# EAGLE board Schematic_EBook_v38 (EAGLE 9.7.0)
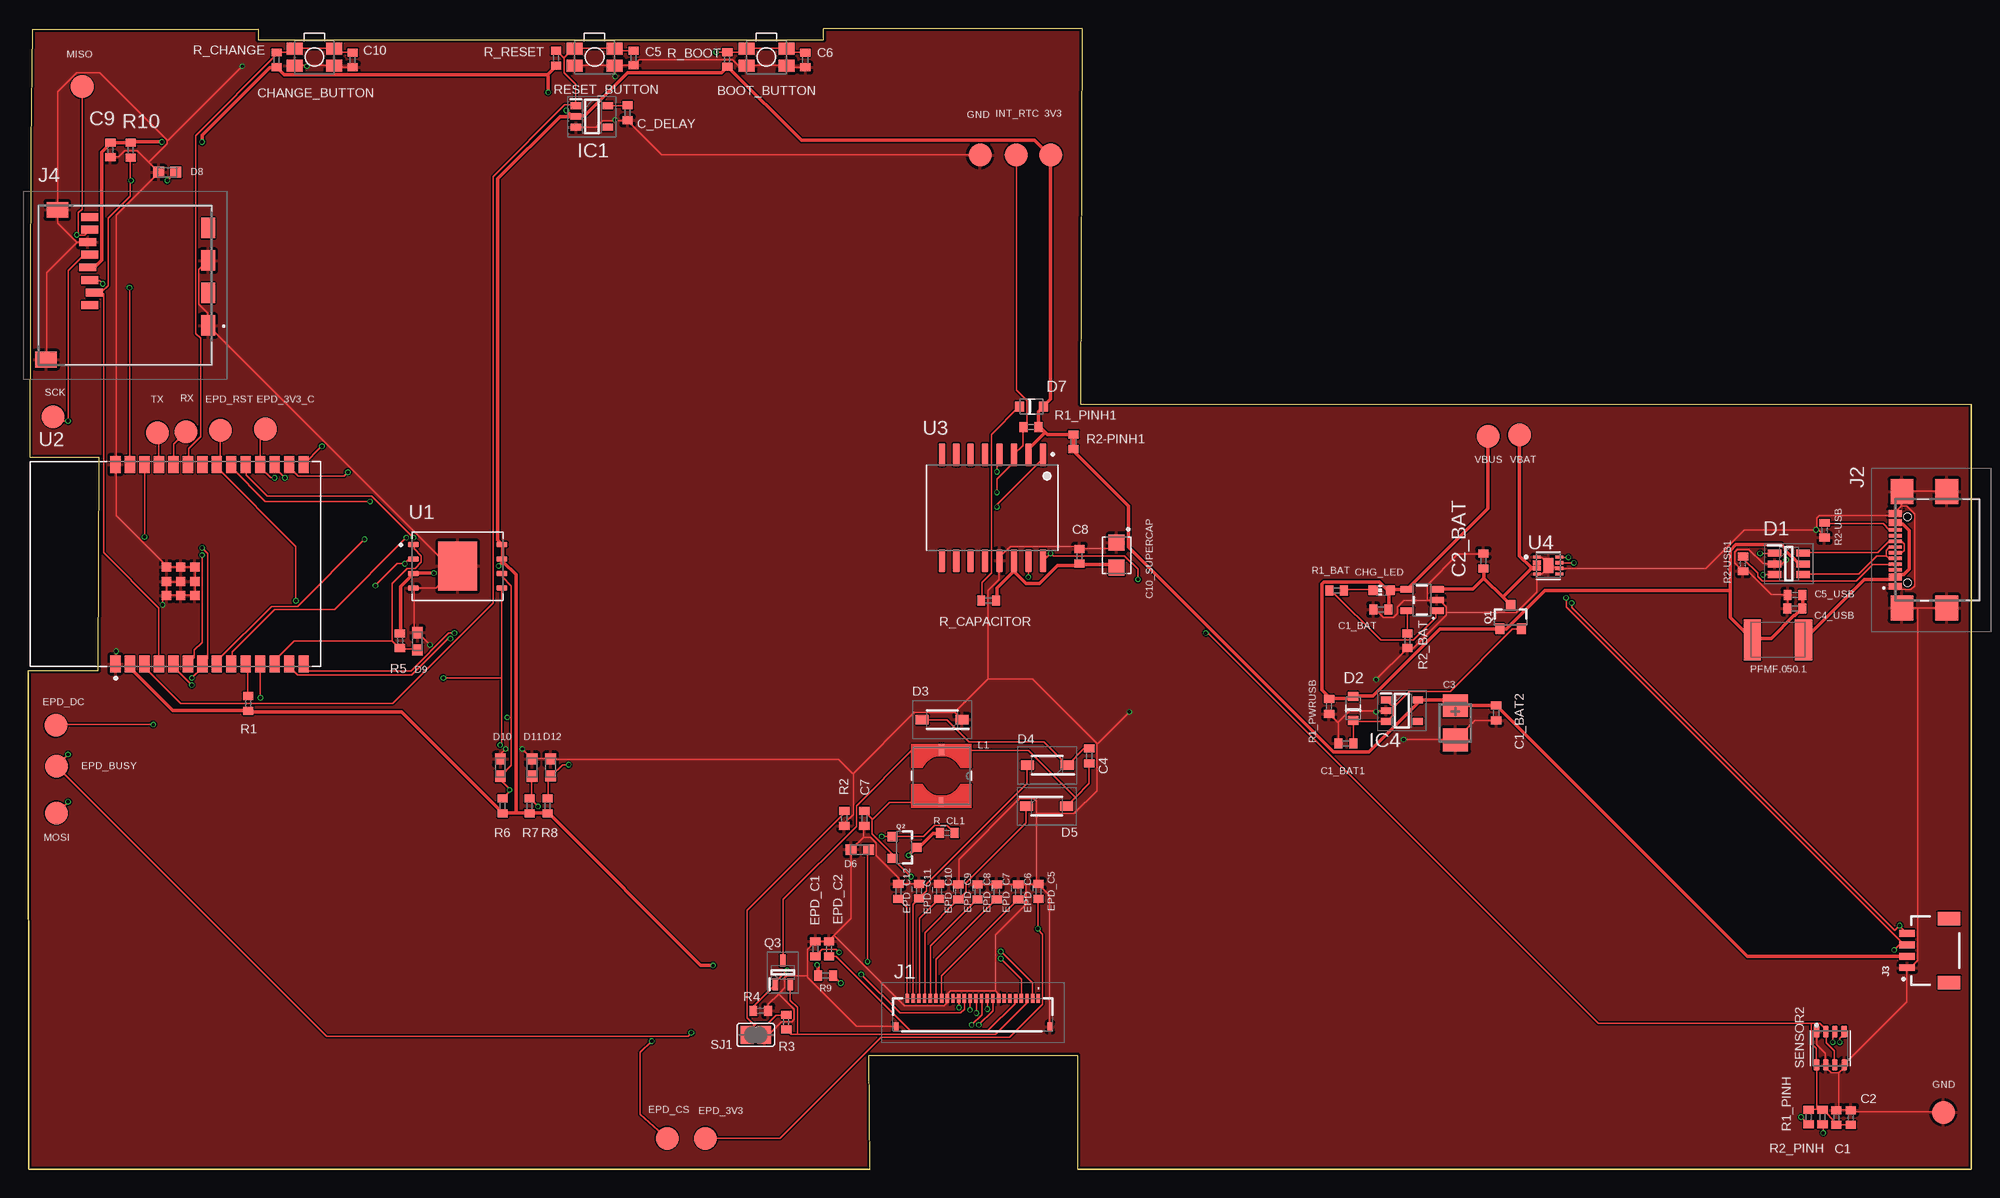
[diagram p0: board, top side]
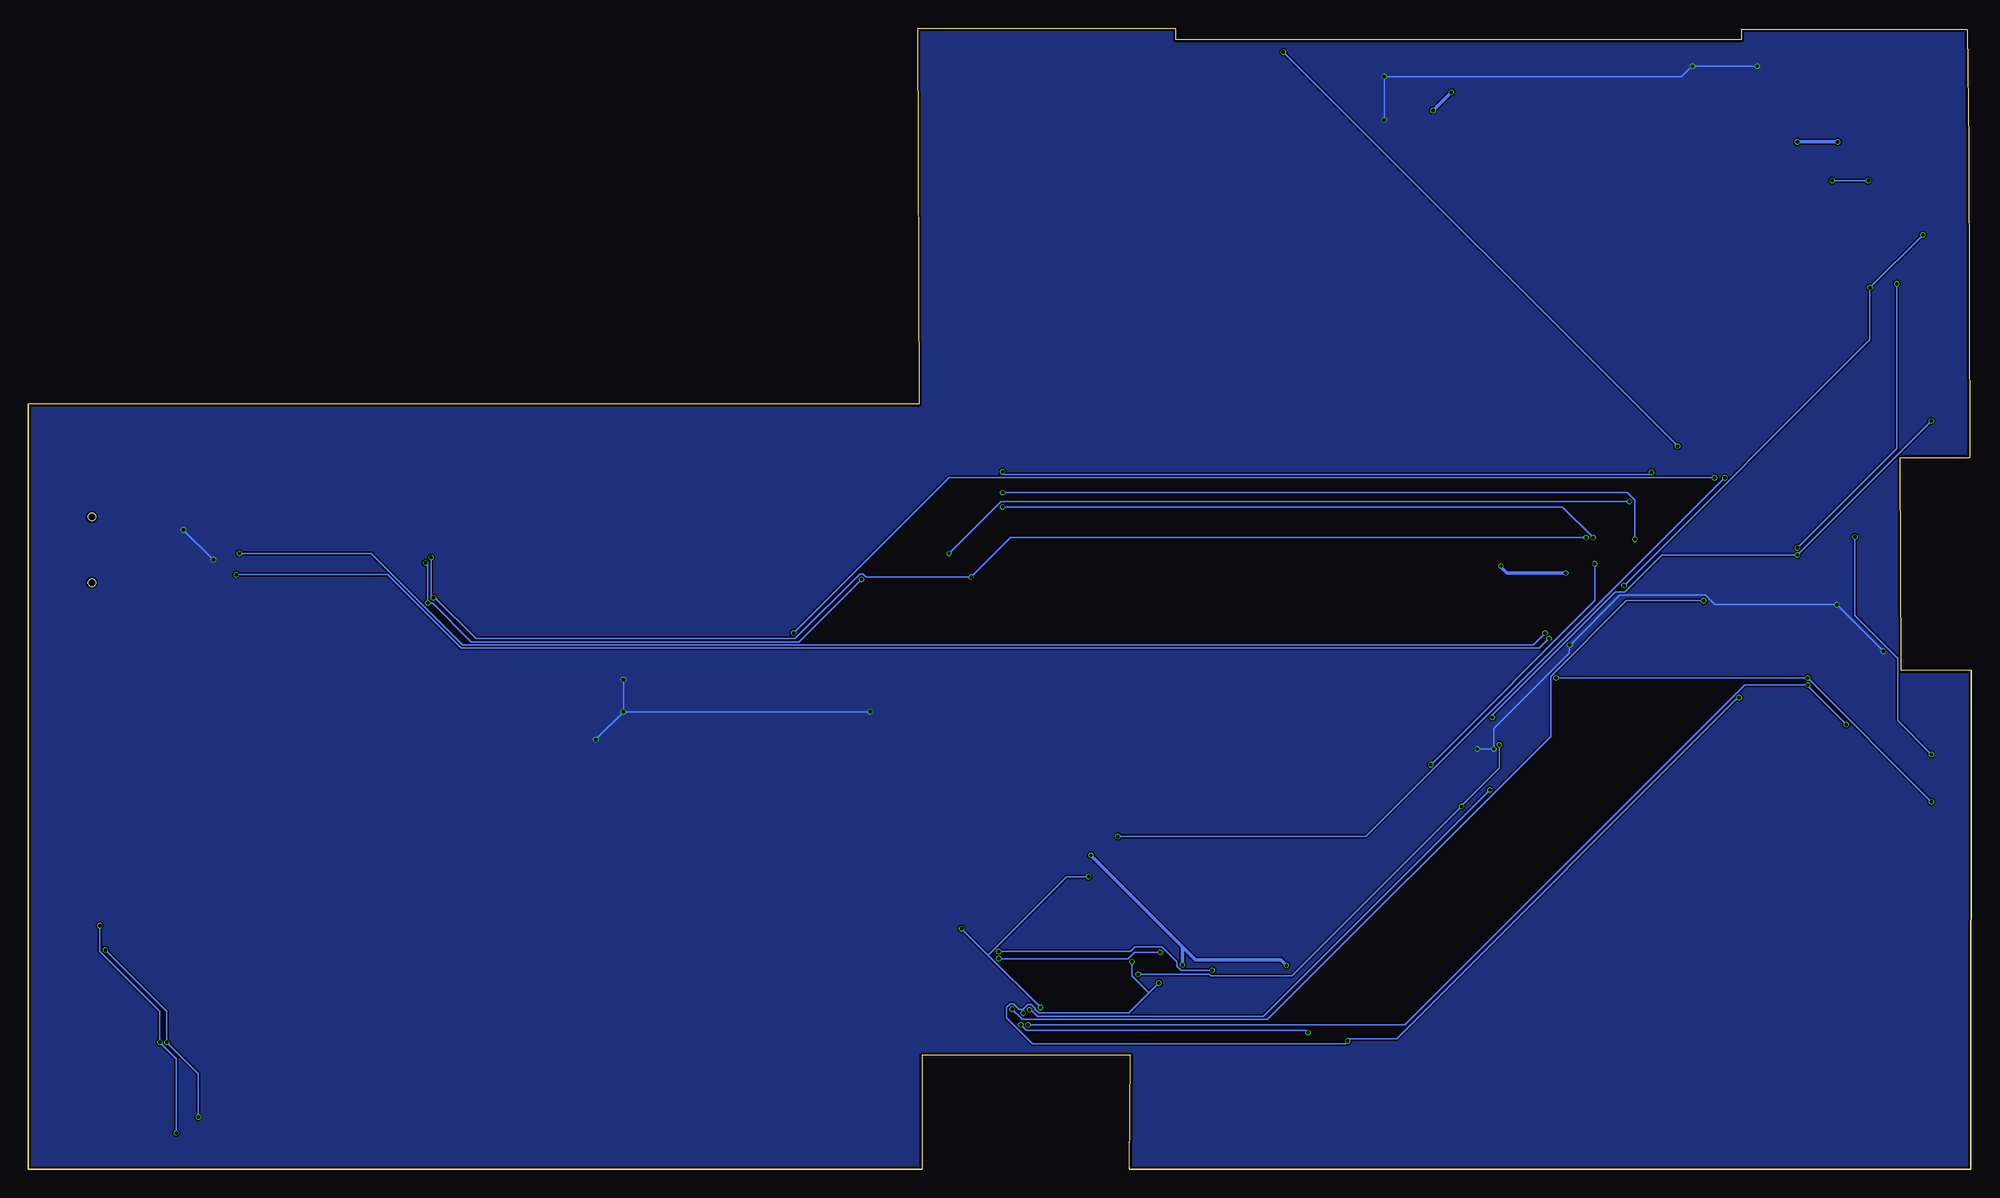
[diagram p1: board, bottom side, seen from below]

Size 170.61 x 100.2 mm. Coordinates in mm from the lower left corner, seen from the top.
Outline: 0.01,0 73.91,0
Outline: 92.11,0 170.61,0
Outline: 170.61,0 170.61,67.2
Outline: 92.51,100.2 69.81,100.17
Outline: 20.19,100.12 0.31,100.1
Outline: 0,43.8 0.01,0
Outline: 0.31,100.1 20.19,100.12
Outline: 69.81,100.17 92.51,100.2
Outline: 92.51,100.2 92.41,67.2 170.61,67.2
Outline: 170.61,67.2 170.61,0
Outline: 170.61,0 92.11,0
Outline: 73.91,0 0.01,0
Outline: 0.01,0 0,43.8
Outline: 73.91,0 73.81,10 92.01,10 92.11,10 92.11,0
Outline: 0,43.8 6.11,43.8 6.21,62.5 0.1,62.5 0.2,89.9 0.31,100.1
Outline: 20.19,100.12 20.19,99.2 69.81,99.2 69.81,100.17
Copper layers (1*16): Top 0.035mm / dielectric 1.6mm / Bottom 0.035mm
Design rules "jlcpcb-2layers.dru *": minimum track width 0.15mm, minimum drill 0.3mm, track to track 5mil, track to pad 5mil, pad to pad 5mil, via to via 5mil, smd to smd 5mil, copper to edge 0.2mm, drill to drill 6mil, minimum pad ring 10mil, minimum via ring 3mil, stop-mask expansion 4mil, vias tented up to drill 0mil, thermal gap 10mil
Net classes: 2 Power: width 0.3 mm

## Footprints (pad centres in the part's own frame; a part is rotated, then mirrored left to right if it is on the bottom)
MYBUTTON = smd 1.4 x 1.05: 1 1.75,0.75; 2 -1.75,0.75; 3 -1.75,-0.75; 4 1.75,-0.75
EAGLE-LTSPICE_C0402 = smd 0.7 x 0.9: 1 -0.65,0; 2 0.65,0
RCL_CT3528 = smd 2 x 2.2: + -1.5,0; - 1.5,0
CAPCP3225X100N = smd 1.4 x 1.4: 1 -1.1,0; 2 1.1,0
ADAFRUIT_CHIP-LED0603 = smd 0.8 x 0.8: A 0,-0.75; C 0,0.75
SOT95P280X145-6N = smd 1.2 x 0.6: 1 -1.25,0.95; 2 -1.25,0; 3 -1.25,-0.95; 4 1.25,-0.95; 5 1.25,0; 6 1.25,0.95
ESP32_WROVER_AVX---SD0805S020S1R0_AVX_SD0805S020S1R0_0 = smd 0.8 x 0.9: 1 -1.05,0; 2 1.05,0
SOD3716X135N = smd 1.15 x 0.8: 1 -1.75,0; 2 1.75,0
DIOC1608X36N = smd 0.97 x 0.94: 1 -0.75,0; 2 0.75,0
SOT95P280X125-5N = smd 0.9 x 0.6: 1 -1.4,0.95; 2 -1.4,0; 3 -1.4,-0.95; 4 1.4,-0.95; 5 1.4,0.95
SOT95P280X120-5N = smd 0.9 x 0.6: 1 -1.4,0.95; 2 -1.4,0; 3 -1.4,-0.95; 4 1.4,-0.95; 5 1.4,0.95
FH34SRJ24S05SH99 = smd 0.3 x 0.8: 1 5.75,1.45; 2 5.25,1.45; 3 4.75,1.45; 4 4.25,1.45; 5 3.75,1.45; 6 3.25,1.45; 7 2.75,1.45; 8 2.25,1.45; 9 1.75,1.45; 10 1.25,1.45; 11 0.75,1.45; 12 0.25,1.45; 13 -0.25,1.45; 14 -0.75,1.45; 15 -1.25,1.45; 16 -1.75,1.45; 17 -2.25,1.45; 18 -2.75,1.45; 19 -3.25,1.45; 20 -3.75,1.45; 21 -4.25,1.45; 22 -4.75,1.45; 23 -5.25,1.45; 24 -5.75,1.45 | smd 0.4 x 0.8: MP1 6.75,-1.05; MP2 -6.75,-1.05
SAMACSYS_PARTS_USB4110GFA = smd 0.3 x 1.15: A1 -3.35,3.678; A4 -2.55,3.678; A5 -1.25,3.678; A6 -0.25,3.678; A7 0.25,3.678; A8 1.25,3.678; A9 2.55,3.678; A12 3.35,3.678; B1 3.05,3.678; B4 2.25,3.678; B5 1.75,3.678; B6 0.75,3.678; B7 -0.75,3.678; B8 -1.75,3.678; B9 -2.25,3.678; B12 -3.05,3.678 | smd 2.18 x 2: MP1 -5.11,-0.827; MP2 5.11,-0.827; MP3 -5.11,3.103; MP4 5.11,3.103 | hole 0.65: -2.89,2.603; 2.89,2.603
JST04_1MM_RA = smd 0.6 x 1.35: 1 -1.5,0; 2 -0.5,0; 3 0.5,0; 4 1.5,0 | smd 1.2 x 2: NC1 2.8,-3.675; NC2 -2.8,-3.675
112ATAARR03ATTEND = smd 1.8 x 1.2: G1 10.6,10.4; G2 4.9,10.4; S1 7.75,10.4; S2 2.05,10.4 | smd 1.4 x 1.9: G3 13.6,-3.85; G4 0.45,-2.85 | smd 0.7 x 1.5: P1 8.8,0; P2 7.7,0.4; P3 6.6,0; P4 5.5,-0.2; P5 4.4,0; P6 3.3,-0.2; P7 2.2,0; P8 1.1,0
IND_4828-WE-TPC_WRE = smd 1.016 x 0.508: 1 -2.286,0 | smd 0.813 x 0.406: 2 2.286,0
ESP32_WROVER_SPARKFUN-IC-POWER_SOT23-5 = smd 0.55 x 1.2: 1 -0.95,-1.3; 2 0,-1.3; 3 0.95,-1.3; 4 0.95,1.3; 5 -0.95,1.3
ESP32C6_VARISTOR_CT/CN1812 = smd 1.5 x 3.6: 1 -2.25,0; 2 2.25,0
ESP32_WROVER_SPARKFUN-DISCRETESEMI_SOT23-3 = smd 0.8 x 0.9: 1 -0.95,-1; 2 0.95,-1; 3 0,1.1
SOT65P210X110-3N = smd 1.05 x 0.5: 1 -1.05,0.65; 2 -1.05,-0.65; 3 1.05,0
ESP32_WROVER_EAGLE-LTSPICE_R0402 = smd 0.7 x 0.9: 1 -0.65,0; 2 0.65,0
ESP32_WROVER_BME680_PSON80P300X300X100-8N = smd 1.016 x 0.5: 1 1.458,1.2; 2 1.458,0.4; 3 1.458,-0.4; 4 1.458,-1.2; 5 -1.458,-1.22; 6 -1.458,-0.4; 7 -1.458,0.4; 8 -1.458,1.2
SJ = smd 1.168 x 1.6: 1 -0.762,0; 2 0.762,0
TP20R = smd 2 x 2: TP 0,0
SON127P600X800X80-9N = smd 0.94 x 0.44: 1 -3.895,1.905; 2 -3.895,0.635; 3 -3.895,-0.635; 4 -3.895,-1.905; 5 3.895,-1.905; 6 3.895,-0.635; 7 3.895,0.635; 8 3.895,1.905 | smd 3.4 x 4.3: 9 0,0
XCVR_ESP32-C6-WROOM-1-N8 = smd 1.5 x 0.9: 1 -8.75,5.26; 2 -8.75,3.99; 3 -8.75,2.72; 4 -8.75,1.45; 5 -8.75,0.18; 6 -8.75,-1.09; 7 -8.75,-2.36; 8 -8.75,-3.63; 9 -8.75,-4.9; 10 -8.75,-6.17; 11 -8.75,-7.44; 12 -8.75,-8.71; 13 -8.75,-9.98; 14 -8.75,-11.25; 15 8.75,-11.25; 16 8.75,-9.98; 17 8.75,-8.71; 18 8.75,-7.44; 19 8.75,-6.17; 20 8.75,-4.9; 21 8.75,-3.63; 22 8.75,-2.36; 23 8.75,-1.09; 24 8.75,0.18; 25 8.75,1.45; 26 8.75,2.72; 27 8.75,3.99; 28 8.75,5.26 | smd 0.8 x 0.8: 29_1 -2.755,0.79; 29_2 -1.505,0.79; 29_3 -0.255,0.79; 29_4 -2.755,-0.46; 29_5 -1.505,-0.46; 29_6 -0.255,-0.46; 29_7 -2.755,-1.71; 29_8 -1.505,-1.71; 29_9 -0.255,-1.71
SOIC127P1032X265-16N = smd 2.05 x 0.59: 1 -4.655,4.445; 2 -4.655,3.175; 3 -4.655,1.905; 4 -4.655,0.635; 5 -4.655,-0.635; 6 -4.655,-1.905; 7 -4.655,-3.175; 8 -4.655,-4.445; 9 4.655,-4.445; 10 4.655,-3.175; 11 4.655,-1.905; 12 4.655,-0.635; 13 4.655,0.635; 14 4.655,1.905; 15 4.655,3.175; 16 4.655,4.445
SON50P200X200X80-9N = smd 0.76 x 0.27: 1 -0.985,0.75; 4 -0.985,-0.75; 5 0.985,-0.75; 6 0.985,-0.25; 7 0.985,0.25; 8 0.985,0.75 | smd 0.813 x 0.406: 2 -0.985,0.25; 3 -0.985,-0.25 | smd 0.9 x 1.3: 9 0,0

## Placement (x,y rotation side)
BOOT_BUTTON  BUTTON_CUSYOMV1  [MYBUTTON]  64.81,97.69 180 top
C1  100nF  [EAGLE-LTSPICE_C0402]  158.77,4.53 90 top
C1_BAT  4.7uF  [EAGLE-LTSPICE_C0402]  118.77,49.15 180 top
C1_BAT1  4.7uF  [EAGLE-LTSPICE_C0402]  115.71,37.4 180 top
C1_BAT2  4.7uF  [EAGLE-LTSPICE_C0402]  128.9,40.07 270 top
C2  100nF  [EAGLE-LTSPICE_C0402]  160.05,4.53 90 top
C2_BAT  4.7uF  [EAGLE-LTSPICE_C0402]  127.79,53.43 90 top
C3  100uF TANT  [RCL_CT3528]  125.32,39.2 270 top
C4  4.7uF/25V  [EAGLE-LTSPICE_C0402]  93.16,36.29 270 top
C4_USB  100nF  [EAGLE-LTSPICE_C0402]  155.12,49.25 180 top
C5  1uF  [EAGLE-LTSPICE_C0402]  53.14,97.61 270 top
C5_USB  4.7uF  [EAGLE-LTSPICE_C0402]  155.15,50.43 180 top
C6  100nF  [EAGLE-LTSPICE_C0402]  68.23,97.43 270 top
C7  10uF  [EAGLE-LTSPICE_C0402]  73.41,30.81 270 top
C8  100nF  [EAGLE-LTSPICE_C0402]  92.31,53.83 90 top
C9  100nF  [EAGLE-LTSPICE_C0402]  7.19,89.52 270 top
C10  100nF  [EAGLE-LTSPICE_C0402]  28.47,97.43 270 top
C10_SUPERCAP  CPH3225A  [CAPCP3225X100N]  95.57,53.94 270 top
C_DELAY  100nF  [EAGLE-LTSPICE_C0402]  52.62,92.79 270 top
CHANGE_BUTTON  BUTTON_CUSYOMV1  [MYBUTTON]  25.11,97.69 180 top
CHG_LED  &  [ADAFRUIT_CHIP-LED0603]  118.85,50.85 90 top
D1  USBLC6-2SC6Y  [SOT95P280X145-6N]  154.61,53.17 0 top
D2  ESP32_WROVER_AVX---SD0805S020S1R0_AVX_SD0805S020S1R0_0_0AVX_SD0805S020S1R0_0_0  [ESP32_WROVER_AVX---SD0805S020S1R0_AVX_SD0805S020S1R0_0]  116.35,40.48 90 top
D3  MBR0530  [SOD3716X135N]  80.24,39.48 180 top
D4  MBR0530  [SOD3716X135N]  89.48,35.48 180 top
D5  MBR0530  [SOD3716X135N]  89.42,31.88 0 top
D6  PGB1010603MR  [DIOC1608X36N]  73.01,28.07 0 top
D7  ESP32_WROVER_AVX---SD0805S020S1R0_AVX_SD0805S020S1R0_0_0AVX_SD0805S020S1R0_0_0  [ESP32_WROVER_AVX---SD0805S020S1R0_AVX_SD0805S020S1R0_0]  88.1,66.98 0 top
D8  PGB1010603MR  [DIOC1608X36N]  12.19,87.57 0 top
D9  PGB1010603MR  [DIOC1608X36N]  34.17,46.37 270 top
D10  PGB1010603MR  [DIOC1608X36N]  41.45,35.27 270 top
D11  PGB1010603MR  [DIOC1608X36N]  44.23,35.27 270 top
D12  PGB1010603MR  [DIOC1608X36N]  45.86,35.28 270 top
EPD_C1  1uF/50V  [EAGLE-LTSPICE_C0402]  69.11,19.35 90 top
EPD_C2  1uF/50V  [EAGLE-LTSPICE_C0402]  70.32,19.35 90 top
EPD_C5  0.1uF/50V  [EAGLE-LTSPICE_C0402]  88.7,24.39 90 top
EPD_C6  1uF/50V  [EAGLE-LTSPICE_C0402]  86.93,24.35 90 top
EPD_C7  1uF/50V  [EAGLE-LTSPICE_C0402]  85.04,24.35 90 top
EPD_C8  1uF/50V  [EAGLE-LTSPICE_C0402]  83.35,24.35 90 top
EPD_C9  1uF/50V  [EAGLE-LTSPICE_C0402]  81.66,24.35 90 top
EPD_C10  1uF/50V  [EAGLE-LTSPICE_C0402]  79.96,24.39 90 top
EPD_C11  1uF/50V  [EAGLE-LTSPICE_C0402]  78.22,24.42 90 top
EPD_C12  1uF/50V  [EAGLE-LTSPICE_C0402]  76.4,24.39 90 top
IC1  BD5229G-TR  [SOT95P280X125-5N]  49.48,92.47 0 top
IC4  XC6220A331MR-G  [SOT95P280X120-5N]  120.62,40.27 0 top
J1  FH34SRJ-24S-0.5SH_99_  [FH34SRJ24S05SH99]  82.95,13.54 0 top
J2  SAMACSYS_PARTS_USB4110-GF-A  [SAMACSYS_PARTS_USB4110GFA]  167.65,54.4 90 top
J3  QWIIC_RIGHT_ANGLE  [JST04_1MM_RA]  165,19.2 90 top
J4  112A-TAAR-R03_ATTEND  [112ATAARR03ATTEND]  5.39,84.71 270 top
L1  68uH  [IND_4828-WE-TPC_WRE]  80.18,34.55 270 top
MCP73831  ESP32_WROVER_SPARKFUN-IC-POWER_MCP73831  [ESP32_WROVER_SPARKFUN-IC-POWER_SOT23-5]  122.39,49.99 90 top
PFMF.050.1  ESP32C6_VARISTORCN1812  [ESP32C6_VARISTOR_CT/CN1812]  153.65,46.5 180 top
Q1  20V/4.2A/52mΩ/1.4W  [ESP32_WROVER_SPARKFUN-DISCRETESEMI_SOT23-3]  130.17,48.46 0 top
Q2  20V/4.2A/52mΩ/1.4W  [ESP32_WROVER_SPARKFUN-DISCRETESEMI_SOT23-3]  76.89,28.26 270 top
Q3  SI1308EDL-T1-GE3  [SOT65P210X110-3N]  66.25,17.28 90 top
R1  10K  [ESP32_WROVER_EAGLE-LTSPICE_R0402]  19.29,40.91 90 top
R1_BAT  200  [ESP32_WROVER_EAGLE-LTSPICE_R0402]  114.9,50.83 0 top
R1_PINH  10K  [ESP32_WROVER_EAGLE-LTSPICE_R0402]  156.34,4.57 90 top
R1_PINH1  10K  [ESP32_WROVER_EAGLE-LTSPICE_R0402]  88.05,65.19 0 top
R1_PWRUSB  100K  [ESP32_WROVER_EAGLE-LTSPICE_R0402]  114.23,40.64 90 top
R2  2.2  [ESP32_WROVER_EAGLE-LTSPICE_R0402]  71.65,30.81 90 top
R2-PINH1  10K  [ESP32_WROVER_EAGLE-LTSPICE_R0402]  91.78,63.89 90 top
R2-USB  5k1  [ESP32_WROVER_EAGLE-LTSPICE_R0402]  157.75,56.13 270 top
R2-USB1  5k1  [ESP32_WROVER_EAGLE-LTSPICE_R0402]  150.58,53.17 90 top
R2_BAT  2K  [ESP32_WROVER_EAGLE-LTSPICE_R0402]  121.11,46.42 90 top
R2_PINH  10K  [ESP32_WROVER_EAGLE-LTSPICE_R0402]  157.56,4.57 90 top
R3  0.47  [ESP32_WROVER_EAGLE-LTSPICE_R0402]  66.55,12.92 90 top
R4  10K  [ESP32_WROVER_EAGLE-LTSPICE_R0402]  64.31,13.91 0 top
R5  10K  [ESP32_WROVER_EAGLE-LTSPICE_R0402]  32.63,46.41 90 top
R6  10K  [ESP32_WROVER_EAGLE-LTSPICE_R0402]  41.65,31.91 270 top
R7  10K  [ESP32_WROVER_EAGLE-LTSPICE_R0402]  44.01,31.91 270 top
R8  10K  [ESP32_WROVER_EAGLE-LTSPICE_R0402]  45.59,31.91 270 top
R9  10K  [ESP32_WROVER_EAGLE-LTSPICE_R0402]  70.01,17.01 180 top
R10  10K  [ESP32_WROVER_EAGLE-LTSPICE_R0402]  8.97,89.51 90 top
R_BOOT  10K  [ESP32_WROVER_EAGLE-LTSPICE_R0402]  61.37,97.47 90 top
R_CAPACITOR  15  [ESP32_WROVER_EAGLE-LTSPICE_R0402]  84.33,49.94 180 top
R_CHANGE  10K  [ESP32_WROVER_EAGLE-LTSPICE_R0402]  21.8,97.44 90 top
R_CL1  10K  [ESP32_WROVER_EAGLE-LTSPICE_R0402]  80.69,29.53 0 top
R_RESET  10K  [ESP32_WROVER_EAGLE-LTSPICE_R0402]  46.34,97.59 90 top
RESET_BUTTON  BUTTON_CUSYOMV1  [MYBUTTON]  49.71,97.69 180 top
SENSOR2  ESP32_WROVER_BME680_BME680  [ESP32_WROVER_BME680_PSON80P300X300X100-8N]  158.25,10.62 90 top
SJ1  &  [SJ]  63.87,11.79 180 top
TP1  TPTP20R  [TP20R]  11.32,64.69 0 top
TP2  TPTP20R  [TP20R]  13.85,64.78 0 top
TP3  TPTP20R  [TP20R]  130.96,64.49 0 top
TP4  TPTP20R  [TP20R]  168.18,4.99 0 top
TP5  TPTP20R  [TP20R]  83.57,89.09 0 top
TP6  TPTP20R  [TP20R]  4.72,95.09 0 top
TP7  TPTP20R  [TP20R]  2.44,31.29 0 top
TP8  TPTP20R  [TP20R]  2.16,66.09 0 top
TP9  TPTP20R  [TP20R]  2.48,35.39 0 top
TP10  TPTP20R  [TP20R]  56.1,2.71 0 top
TP11  TPTP20R  [TP20R]  2.4,38.99 0 top
TP12  TPTP20R  [TP20R]  16.85,64.91 0 top
TP13  TPTP20R  [TP20R]  20.8,65.01 0 top
TP14  TPTP20R  [TP20R]  128.2,64.39 0 top
TP15  TPTP20R  [TP20R]  86.75,89.09 0 top
TP16  TPTP20R  [TP20R]  89.8,89.09 0 top
TP17  TPTP20R  [TP20R]  59.45,2.69 0 top
U1  W25Q512JVEIQ  [SON127P600X800X80-9N]  37.7,52.96 0 top
U2  ESP32-C6-WROOM-1-N8  [XCVR_ESP32-C6-WROOM-1-N8]  12.91,53.14 90 top
U3  DS3231SN#  [SOIC127P1032X265-16N]  84.66,58.1 270 top
U4  MAX17048G+T10  [SON50P200X200X80-9N]  133.48,53.02 0 top

## Library data of the parts
BOOT_BUTTON CHANGE_BUTTON CHG_LED PFMF.050.1 RESET_BUTTON SJ1 TP1-TP17 = DeskAssistant v19 v1
C1 C1_BAT C1_BAT1 C1_BAT2 C2 C2_BAT C4 C4_USB C5 C5_USB C6-C10 C_DELAY EPD_C1 EPD_C2 EPD_C5-EPD_C12 = DeskAssistant v19 v1; SPICEMODEL: NONE; SPICEPREFIX: C
C3 = DeskAssistant v19 v1; SPICEPREFIX: C
C10_SUPERCAP = DeskAssistant v19 v1; AVAILABILITY: Not in stock; CHECK_PRICES: https://www.snapeda.com/parts/CPH3225A/Seiko+Instruments/view-part/?ref=eda; DESCRIPTION: 11 mF (EDLC) Supercapacitor 3.3 V 1210 (3225 Metric) - -; MF: Seiko Instruments; MP: CPH3225A; PACKAGE: 1210 Seiko; PRICE: None; PURCHASE-URL: https://www.snapeda.com/api/url_track_click_mouser/?unipart_id=562593&manufacturer=Seiko Instruments&part_name=CPH3225A&search_term=None; SNAPEDA_LINK: https://www.snapeda.com/parts/CPH3225A/Seiko+Instruments/view-part/?ref=snap
D1 = DeskAssistant v19 v1; AVAILABILITY: In Stock; CHECK_PRICES: https://www.snapeda.com/parts/USBLC6-2SC6Y/STMicroelectronics/view-part/?ref=eda; DESCRIPTION: 17V Clamp 5A (8/20µs) Ipp Tvs Diode Surface Mount SOT-23-6; MF: STMicroelectronics; MP: USBLC6-2SC6Y; PACKAGE: SOT-23-6 STMicroelectronics; PRICE: None; SNAPEDA_LINK: https://www.snapeda.com/parts/USBLC6-2SC6Y/STMicroelectronics/view-part/?ref=snap
D2 D7 = DeskAssistant v19 v1; CENTROID_NOT_SPECIFIED: No; DATASHEET: http://datasheets.avx.com/schottky.pdf; DIGIKEY_DESCRIPTION: DIODE SCHOTTKY 20V 1A 0805; DIGIKEY_PART_NUMBER: 478-7800-1-ND; LEAD_FREE: yes; MF: AVX; MOUSER_PART_NUMBER: 581-SD0805S020S1R0; PACKAGE: 0805 (2012 metric); PREFIX: D; ROHS: yes; TEMPERATURE_RANGE_HIGH: +125°C; TEMPERATURE_RANGE_LOW: -55°C
D3-D5 = DeskAssistant v19 v1; AVAILABILITY: In Stock; CHECK_PRICES: https://www.snapeda.com/parts/MBR0530/Onsemi/view-part/?ref=eda; DESCRIPTION: Diode Schottky 30 V 500mA Surface Mount SOD-123; MF: ON Semiconductor; MP: MBR0530; PACKAGE: SOD-123-2 ON Semiconductor; PRICE: None; PURCHASE-URL: https://www.snapeda.com/api/url_track_click_mouser/?unipart_id=179458&manufacturer=ON Semiconductor&part_name=MBR0530&search_term=None; SNAPEDA_LINK: https://www.snapeda.com/parts/MBR0530/Onsemi/view-part/?ref=snap
D6 D8-D12 = DeskAssistant v19 v1; AVAILABILITY: In Stock; CHECK_PRICES: https://www.snapeda.com/parts/PGB1010603MR/Littelfuse/view-part/?ref=eda; DESCRIPTION: 150V (Typ) Clamp - Ipp Tvs Diode Surface Mount 0603 (1608 Metric); MF: Littelfuse Inc.; MP: PGB1010603MR; PACKAGE: 0603 Littelfuse Inc.; PRICE: None; PURCHASE-URL: https://www.snapeda.com/api/url_track_click_mouser/?unipart_id=5659453&manufacturer=Littelfuse Inc.&part_name=PGB1010603MR&search_term=None; SNAPEDA_LINK: https://www.snapeda.com/parts/PGB1010603MR/Littelfuse/view-part/?ref=snap
IC1 = DeskAssistant v19 v1; DESCRIPTION: Voltage Detector with Adjustable Delay Time: CMOS processes are utilized to develop high precision, low current consumption CMOS reset ICs that allow arbitrary setting of the delay time. The extensive lineup includes both Nch Open Drain and CMOS output types in a wide range of detection voltages (from 2.3V to 6.0V, in 0.1V steps), enabling selection of the ideal solution based on customer requirements. In addition, the entire series is of course both lead-free and RoHS-compliant.; HEIGHT: 1.25mm; MANUFACTURER_NAME: ROHM Semiconductor; MANUFACTURER_PART_NUMBER: BD5229G-TR; MOUSER_PART_NUMBER: 755-BD5229G-TR; MOUSER_PRICE-STOCK: https://www.mouser.co.uk/ProductDetail/ROHM-Semiconductor/BD5229G-TR?qs=4kLU8WoGk0vvnhrrYwdszw%3D%3D
IC4 = DeskAssistant v19 v1; DESCRIPTION: LDO Voltage Regulators; HEIGHT: 1.2mm; MANUFACTURER_NAME: Torex; MANUFACTURER_PART_NUMBER: XC6220A331MR-G; MOUSER_PART_NUMBER: 865-XC6220A331MR-G; MOUSER_PRICE-STOCK: https://www.mouser.co.uk/ProductDetail/Torex-Semiconductor/XC6220A331MR-G?qs=AsjdqWjXhJ8ZSWznL1J0gg%3D%3D
J1 = DeskAssistant v19 v1; DESCRIPTION: 24 Position FFC, FPC Connector Contacts, Top and Bottom 0.020" (0.50mm) Surface Mount, Right Angle; HEIGHT: 1.1mm; MANUFACTURER_NAME: Hirose; MANUFACTURER_PART_NUMBER: FH34SRJ-24S-0.5SH(99); MOUSER_PART_NUMBER: 798-FH34SRJ24S05SH99; MOUSER_PRICE-STOCK: https://www.mouser.co.uk/ProductDetail/Hirose-Connector/FH34SRJ-24S-0.5SH99?qs=vcbW%252B4%252BSTIpKBl5ap9J8Fw%3D%3D
J2 = DeskAssistant v19 v1; DESCRIPTION: CONN USB 2.0 TYPE-C R/A SMT; HEIGHT: 3.26mm; MANUFACTURER_NAME: GCT (GLOBAL CONNECTOR TECHNOLOGY); MANUFACTURER_PART_NUMBER: USB4110-GF-A; MOUSER_PART_NUMBER: 640-USB4110-GF-A; MOUSER_PRICE-STOCK: https://www.mouser.co.uk/ProductDetail/GCT/USB4110-GF-A?qs=KUoIvG%2F9IlYiZvIXQjyJeA%3D%3D
J3 = DeskAssistant v19 v1; PROD_ID: CONN-13694
J4 = DeskAssistant v19 v1; DESCRIPTION: Micro SD Card Socket, Push-Push Type, Top Mount, SMT, H=1.83mm, 10u; HEIGHT: 1.9mm; MANUFACTURER_NAME: ATTEND; MANUFACTURER_PART_NUMBER: 112A-TAAR-R03 ATTEND
L1 = DeskAssistant v19 v1; COPYRIGHT: Copyright (C) 2024 Ultra Librarian. All rights reserved.; MANUFACTURER_PART_NUMBER: 744043680; MFR_NAME: Wurth Electronics
MCP73831 = DeskAssistant v19 v1; PROD_ID: IC-09995
Q1 Q2 = DeskAssistant v19 v1; PROD_ID: TRAN-14388
Q3 = DeskAssistant v19 v1; AVAILABILITY: In Stock; CHECK_PRICES: https://www.snapeda.com/parts/SI1308EDL-T1-GE3/Vishay+Siliconix/view-part/?ref=eda; DESCRIPTION: Si1308EDL-T1-GE3 N-channel MOSFET Transistor, 1.5 A, 30 V, 3-Pin SC-70 | Siliconix / Vishay SI1308EDL-T1-GE3; MF: Vishay Siliconix; MP: SI1308EDL-T1-GE3; PACKAGE: SOT-323 Vishay Semiconductor; PRICE: None; PURCHASE-URL: https://www.snapeda.com/api/url_track_click_mouser/?unipart_id=274603&manufacturer=Vishay Siliconix&part_name=SI1308EDL-T1-GE3&search_term=None; SNAPEDA_LINK: https://www.snapeda.com/parts/SI1308EDL-T1-GE3/Vishay+Siliconix/view-part/?ref=snap
R1 R1_BAT R1_PINH R1_PINH1 R1_PWRUSB R2 R2-PINH1 R2-USB R2-USB1 R2_BAT R2_PINH R3-R10 R_BOOT R_CAPACITOR R_CHANGE R_CL1 R_RESET = DeskAssistant v19 v1; SPICEMODEL: NONE; SPICEPREFIX: R
SENSOR2 = DeskAssistant v19 v1; AVAILABILITY: Unavailable; DESCRIPTION: Integrated Environmental Unit; MF: Bosch Sensortec; MP: BME680; PACKAGE: LGA-8 Bosch Tools; PRICE: None
U1 = DeskAssistant v19 v1; AVAILABILITY: In Stock; CHECK_PRICES: https://www.snapeda.com/parts/W25Q512JVEIQ/Winbond+Electronics/view-part/?ref=eda; DESCRIPTION: FLASH - NOR Memory IC 512Mb (64M x 8) SPI - Quad I/O 133 MHz 8-WSON (8x6); MF: Winbond Electronics; MP: W25Q512JVEIQ; PACKAGE: Package; PRICE: None; SNAPEDA_LINK: https://www.snapeda.com/parts/W25Q512JVEIQ/Winbond+Electronics/view-part/?ref=snap
U2 = DeskAssistant v19 v1; AVAILABILITY: In Stock; CHECK_PRICES: https://www.snapeda.com/parts/ESP32-C6-WROOM-1-N8/Espressif+Systems/view-part/?ref=eda; DESCRIPTION: Multiprotocol Modules ESP32-C6 module, Wi-Fi 6 in 2.4 GHz band, Bluetooth 5, Zigbee 3.0 and Thread. ESP34-WROOM Compatible - ENGINEERING SAMPLE; MF: Espressif Systems; MP: ESP32-C6-WROOM-1-N8; PACKAGE: None; PRICE: None; SNAPEDA_LINK: https://www.snapeda.com/parts/ESP32-C6-WROOM-1-N8/Espressif+Systems/view-part/?ref=snap
U3 = DeskAssistant v19 v1; AVAILABILITY: In Stock; CHECK_PRICES: https://www.snapeda.com/parts/DS3231SN%23/Analog+Devices/view-part/?ref=eda; DESCRIPTION: Extremely Accurate I²C-Integrated RTC/TCXO/Crystal; MF: Analog Devices; MP: DS3231SN#; PACKAGE: SOIC-16 Maxim; PRICE: None; PURCHASE-URL: https://www.snapeda.com/api/url_track_click_mouser/?unipart_id=99048&manufacturer=Analog Devices&part_name=DS3231SN#&search_term=None; SNAPEDA_LINK: https://www.snapeda.com/parts/DS3231SN%23/Analog+Devices/view-part/?ref=snap
U4 = DeskAssistant v19 v1; AVAILABILITY: In Stock; CHECK_PRICES: https://www.snapeda.com/parts/MAX17048G+T10/Analog+Devices/view-part/?ref=eda; DESCRIPTION: 3µA 1-Cell/2-Cell Fuel Gauge with ModelGauge; MF: Analog Devices; MP: MAX17048G+T10; PACKAGE: TDFN-8 Maxim; PRICE: None; PURCHASE-URL: https://www.snapeda.com/api/url_track_click_mouser/?unipart_id=329239&manufacturer=Analog Devices&part_name=MAX17048G+T10&search_term=None; SNAPEDA_LINK: https://www.snapeda.com/parts/MAX17048G+T10/Analog+Devices/view-part/?ref=snap

## Nets
3V3 [Power]: C1_BAT2.1 C3.+ C9.1 D7.2 IC1.2 IC4.5 J3.2 J4.P4 Q2.3 R1.1 R1_PINH1.2 R2-PINH1.1 R2-PINH1.2 R5.2 R6.2 R7.2 R8.2 R9.2 R10.2 R_BOOT.1 R_CHANGE.1 R_CL1.1 R_RESET.1 TP16.TP U1.3 U1.7 U1.8 U2.2 U3.2
32KHZ: U2.9 U3.1
DN: D1.4 J2.A7 J2.B7
DP: D1.6 J2.A6 J2.B6
EPD_3V3: C7.1 EPD_C5.1 J1.15 J1.16 L1.2 Q2.2 TP17.TP
EPD_3V3_C: Q2.1 R_CL1.2 TP13.TP U2.18
EPD_BUSY: J1.9 TP9.TP U2.26
EPD_CS: D6.2 J1.12 R9.1 TP10.TP U2.11
EPD_DC: J1.11 TP11.TP U2.5
EPD_RST: J1.10 TP12.TP U2.21
FLASH_CS: D9.2 R5.1 U1.1 U2.12
GDR: J1.2 Q3.1 R4.1
GND: BOOT_BUTTON.1 BOOT_BUTTON.2 C1.2 C1_BAT1.2 C1_BAT2.2 C1_BAT.2 C2.2 C2_BAT.2 C3.- C4_USB.2 C5.2 C5_USB.2 C6.2 C7.2 C8.2 C9.2 C10.2 C10_SUPERCAP.1 C_DELAY.2 CHANGE_BUTTON.1 CHANGE_BUTTON.2 D1.2 D3.1 D6.1 D8.1 D9.1 D10.1 D11.1 D12.1 EPD_C1.2 EPD_C2.2 EPD_C5.2 EPD_C6.2 EPD_C7.2 EPD_C8.2 EPD_C9.2 EPD_C10.2 EPD_C11.2 EPD_C12.2 IC1.3 IC4.2 J1.8 J1.17 J1.MP1 J1.MP2 J2.A1 J2.A12 J2.B1 J2.B12 J2.MP1 J2.MP2 J2.MP3 J2.MP4 J3.1 J4.G1 J4.G2 J4.G3 J4.G4 J4.P6 MCP73831.2 R1_PWRUSB.1 R2-USB1.1 R2-USB.2 R2.1 R2_BAT.1 R4.2 RESET_BUTTON.1 RESET_BUTTON.2 SENSOR2.1 SENSOR2.5 SENSOR2.7 SJ1.1 TP4.TP TP5.TP U1.4 U1.9 U2.1 U2.28 U2.29_1 U2.29_2 U2.29_3 U2.29_4 U2.29_5 U2.29_6 U2.29_7 U2.29_8 U2.29_9 U3.13 U4.1 U4.4 U4.6 U4.9
GPIO8: R1.2 U2.10
I2C_PW: C1.1 C2.1 R1_PINH.2 R2_PINH.2 SENSOR2.2 SENSOR2.6 SENSOR2.8 U2.17
INT_RTC: R1_PINH1.1 TP15.TP U2.8 U3.3
IO/BOOT: BOOT_BUTTON.3 BOOT_BUTTON.4 C6.1 R_BOOT.2 U2.15
IO/CHANGE: C10.1 CHANGE_BUTTON.3 CHANGE_BUTTON.4 R_CHANGE.2 U2.23
MISO: D12.2 J4.P7 R8.1 TP6.TP U1.2 U2.27
MOSI: D11.2 J1.14 J4.P3 R7.1 TP7.TP U1.5 U2.7
N$1: J2.A5 R2-USB1.2
N$2: J2.B5 R2-USB.1
N$3: C1_BAT1.1 D2.1 IC4.1 IC4.3 Q1.2
N$5: MCP73831.1 R1_BAT.1
N$6: C4.1 D3.2 D4.1
N$7: CHG_LED.C R1_BAT.2
N$8: MCP73831.5 R2_BAT.2
N$10: EPD_C2.1 J1.5
N$11: EPD_C1.1 J1.4
N$12: C_DELAY.1 IC1.5
N$14: D7.1 R_CAPACITOR.2
N$20: EPD_C12.1 J1.24
N$22: EPD_C10.1 J1.22
N$23: EPD_C8.1 J1.20
N$25: EPD_C6.1 J1.18
N$26: EPD_C7.1 J1.19
PREVGH: D5.1 EPD_C9.1 J1.21
PREVGL: D4.2 EPD_C11.1 J1.23
RESE: J1.3 Q3.2 R3.1
RESE': R2.2 R3.2 SJ1.2
RESET: C5.1 IC1.1 R_RESET.2 RESET_BUTTON.3 RESET_BUTTON.4 U2.3
RTC_RST: U2.16 U3.4
RX: TP2.TP U2.24
SCK: D10.2 J1.13 J4.P5 R6.1 TP8.TP U1.6 U2.6
SCL: J3.4 R2_PINH.1 SENSOR2.4 U2.20 U3.16 U4.7
SDA: J3.3 R1_PINH.1 SENSOR2.3 U2.19 U3.15 U4.8
SRC: C4.2 D5.2 L1.1 Q3.3
SS_SD: D8.2 J4.P2 R10.1 U2.4
TX: TP1.TP U2.25
USB_D+: D1.1 U2.14
USB_D-: D1.3 U2.13
VBAT [Power]: C2_BAT.1 MCP73831.3 Q1.3 TP3.TP U4.2 U4.3
VBUS [Power]: C1_BAT.1 C4_USB.1 C5_USB.1 CHG_LED.A D1.5 D2.2 MCP73831.4 PFMF.050.1.2 Q1.1 R1_PWRUSB.2 TP14.TP
VRTC [Power]: C8.1 C10_SUPERCAP.2 R_CAPACITOR.1 U3.14
VUSB [Power]: J2.A4 J2.A9 J2.B4 J2.B9 PFMF.050.1.1

## Tracks (layer width: path | path; a pad name or v marks a point on that pad's centre or on a via)
3V3  (via drill 0.3)
  Top 0.3: v69.26,17.94 69.33,17.87 69.33,17.04 R9.2 | v77.29,27.56 Q2.3 78.13,28.18 79.44,29.5 80,29.5 R_CL1.1 | U2.2 8.94,44.39 8.94,44.04 12.68,40.3 19.26,40.3 R1.1 19.4,40.16 32.77,40.16 41.56,31.37 R6.2 41.7,31.3 42.81,31.3 | R5.2 32.7,47.09 32.7,51.18 33.81,52.28 U1.3 33.94,52.35 v35.61,52.35 | 42.81,31.3 43.99,31.3 R7.2 44.12,31.3 45.58,31.3 R8.2 45.72,31.23 59.05,17.9 v60.13,17.9 | 41.7,53.32 41.7,53.46 U1.7 41.63,53.6 41.63,54.85 U1.8 41.2,55.26 41.2,86.99 46.68,92.47 IC1.2 | 41.7,53.32 42.81,52.22 42.81,31.44 42.81,31.3 | v41.28,52.98 41.56,53.25 41.7,53.32 | J3.2 164.96,18.7 150.98,18.7 129.02,40.65 C1_BAT2.1 128.89,40.72 125.42,40.72 C3.+ 125.28,40.72 124.8,41.2 122.03,41.2 IC4.5 121.96,41.06 121.96,40.86 117.74,36.63 114.62,36.63 96.62,54.64 96.62,58.24 91.77,63.09 R2-PINH1.1 91.77,63.29 91.77,64.47 R2-PINH1.2 91.63,64.54 89.48,64.54 89.31,64.71 | J4.P4 5.21,79.22 5.83,79.22 6.45,79.84 6.45,89.33 7.14,90.03 C9.1 7.21,90.16 8.94,90.16 R10.2 9.08,90.23 v11.71,90.23 | 45.58,96.12 22.45,96.12 21.83,96.74 R_CHANGE.1 21.78,96.77 21.19,96.77 15.25,90.83 15.25,90.33 v15.25,90.23 | 45.58,96.12 46.34,96.88 R_RESET.1 | IC1.2 48.14,92.52 48.83,92.52 52.64,96.33 60.88,96.33 R_BOOT.1 61.51,96.74 67.88,90.37 88.37,90.37 89.62,89.12 TP16.TP 89.76,89.06 89.76,67.66 89.21,67.1 D7.2 89.14,66.97 88.72,66.55 88.72,65.23 R1_PINH1.2 88.86,65.16 89.31,64.71 | U3.2 87.89,62.81 87.89,63.29 89.21,64.61 89.31,64.71 | v45.65,94.6 45.65,95.98 45.58,96.12 | v47.24,93 47.79,92.45 47.93,92.45 IC1.2
  Bottom 0.3: v69.26,17.94 69.26,19.53 v77.29,27.56 68.13,18.4 60.63,18.4 v60.13,17.9 | v35.61,52.35 40.76,52.35 41.28,52.88 v41.28,52.98 | v15.25,90.23 v11.71,90.23 | v47.24,93 v45.65,94.6
32KHZ  (via drill 0.3)
  Top 0.15: v33.18,55.47 26.88,49.17 21.61,49.17 17.88,45.44 17.88,44.46 U2.9 | v85.05,58.17 85.05,58.38 89.07,62.39 89.07,62.74 U3.1
  Bottom 0.15: v33.18,55.47 35.88,58.17 v85.05,58.17
DN
  Top 0.15: 163.16,53.88 163.37,53.67 163.93,53.67 J2.B7 | 163.16,53.88 163.16,54.36 163.44,54.64 163.93,54.64 J2.A7 | D1.4 155.89,52.28 160.74,52.28 162.33,53.88 163.1,53.88 163.16,53.88
DP
  Top 0.15: J2.A6 164,54.15 164.55,54.15 164.76,54.36 164.76,54.91 164.55,55.12 164,55.12 J2.B6 163.93,55.12 163.37,55.12 162.4,54.15 155.89,54.15 D1.6
EPD_3V3  (via drill 0.3)
  Top 0.15: 74.11,30.75 74.11,29.43 75.84,27.7 75.84,27.35 Q2.2 75.91,27.29 v77.5,25.69 | 74.11,30.75 73.42,31.44 C7.1 | L1.2 80.13,32.2 75.63,32.2 74.18,30.75 74.11,30.75 | J1.16 81.24,15.03 81.66,15.03 J1.15 81.73,14.96 v81.73,14.2 | EPD_C5.1 88.65,23.68 v88.65,21.12 88.65,21.05 89.07,20.64 89.07,14.47 86.16,11.56 74.87,11.56 66.01,2.7 59.5,2.7 TP17.TP
  Bottom 0.15: v81.73,14.2 86.33,18.8 | 86.33,18.8 v88.65,21.12 | v77.5,25.69 79.44,25.69 86.3,18.84 86.33,18.8
EPD_3V3_C  (via drill 0.3)
  Top 0.15: R_CL1.2 81.31,29.57 80.69,30.19 79.58,30.19 78.61,29.22 75.91,29.22 Q2.1 75.84,29.22 v74.94,29.22 | TP13.TP 20.79,64.96 20.37,64.54 20.37,61.91 U2.18 20.37,61.84 20.37,61.63 21.27,60.73 v21.62,60.73
  Bottom 0.15: v74.94,29.22 53.13,29.22 v21.62,60.73
EPD_BUSY  (via drill 0.3)
  Top 0.15: v83.46,12.67 84.7,13.92 84.7,14.96 J1.9 | v58.22,11.99 57.92,11.69 26.2,11.69 2.5,35.39 TP9.TP 2.5,35.46 v3.47,36.42 | v10.19,55.54 10.19,61.84 U2.26
  Bottom 0.15: v83.46,12.67 82.97,12.19 59.52,12.19 58.42,12.19 v58.22,11.99 | v10.19,55.54 10.19,48.61 6.45,44.87 6.45,39.4 v3.47,36.42
EPD_CS  (via drill 0.3)
  Top 0.15: v83.25,13.71 83.25,14.96 J1.12 | v71.34,16.34 70.72,16.97 R9.1 | v73.69,18.21 73.69,28.05 D6.2 | v20.37,41.41 20.37,44.39 U2.11 | v54.73,11.25 53.73,10.25 53.73,4.84 TP10.TP
  Bottom 0.15: 83.25,14.06 v83.25,13.71 | 83.25,14.06 82.83,14.47 82.56,14.47 82.21,14.13 82.21,14.06 81.86,13.71 73.97,13.71 72.2,15.48 | v71.34,16.34 72.2,15.48 | v73.69,18.21 73.69,16.97 72.24,15.51 72.2,15.48 | v20.37,41.41 20.47,41.41 50.43,11.45 54.53,11.45 v54.73,11.25 54.96,11.02 82.43,11.02 84.7,13.3 84.7,14.2 84.36,14.54 84.08,14.54 83.6,14.06 83.32,14.06 83.25,14.06
EPD_DC  (via drill 0.3)
  Top 0.15: v82.83,12.67 83.73,13.57 83.73,14.96 J1.11 | v14.35,42.52 12.75,44.11 12.75,44.39 U2.5 | v10.95,39.06 2.44,39.06 TP11.TP
  Bottom 0.15: v82.83,12.67 49.73,12.67 19.89,42.52 v14.35,42.52 14.35,42.45 v10.95,39.06
EPD_RST  (via drill 0.3)
  Top 0.15: v84.22,14.06 84.22,14.96 J1.10 | v23.49,49.93 23.49,54.71 16.56,61.63 16.56,61.84 U2.21 16.56,61.91 16.84,62.19 16.84,64.89 TP12.TP
  Bottom 0.15: v84.22,14.06 83.32,13.16 61.78,13.16 36.92,38.02 36.92,43.28 30.27,49.93 v23.49,49.93
FLASH_CS
  Top 0.15: D9.2 34.15,45.64 34.08,45.7 32.7,45.7 R5.1 32.56,45.77 31.94,46.4 | 31.94,46.4 31.94,51.45 33.25,52.77 33.94,52.77 34.5,53.32 34.5,53.88 33.87,54.5 33.87,54.85 U1.1 | U2.12 21.69,44.46 21.69,44.74 23.35,46.4 31.87,46.4 31.94,46.4
GDR  (via drill 0.3)
  Top 0.15: v85.4,19.11 88.17,16.34 88.17,15.03 J1.2 | v66.63,17.45 65.66,16.48 65.66,16.27 Q3.1 65.59,16.2 63.72,14.34 63.72,13.92 R4.1
  Bottom 0.15: v85.4,19.11 73.83,19.11 73.42,19.53 71.06,19.53 69.75,18.21 69.75,17.8 69.4,17.45 v66.63,17.45
GND  (via drill 0.3)
  Top 0.15: C6.2 68.22,96.81 66.7,96.81 66.63,96.88 BOOT_BUTTON.2 66.49,96.95 63.1,96.95 BOOT_BUTTON.1 63.03,96.95 62.34,96.95 61.85,97.44 53.61,97.44 53.2,97.02 C5.2 53.13,96.95 RESET_BUTTON.2 | RESET_BUTTON.1 48,96.95 51.39,96.95 RESET_BUTTON.2 | 51.53,92.1 52.57,92.1 C_DELAY.2 52.64,92.1 55.62,89.12 83.53,89.12 TP5.TP | 51.53,92.1 50.43,92.1 49.87,91.55 48.14,91.55 IC1.3 | v51.53,95.98 51.53,96.88 RESET_BUTTON.2 | v51.53,92.17 51.53,92.1 | U2.29_1 12.13,50.41 12.13,51.59 U2.29_2 12.2,51.59 13.31,51.59 U2.29_5 | U2.29_1 12.2,50.41 13.31,50.41 U2.29_4 13.38,50.41 14.55,50.41 U2.29_7 14.62,50.41 14.62,51.59 U2.29_8 14.62,51.66 14.62,52.84 U2.29_9 14.55,52.91 13.38,52.91 U2.29_6 13.31,52.91 12.13,52.91 U2.29_3 12.13,52.98 7.7,57.41 7.7,61.84 U2.28 7.7,61.91 7.7,83.79 11.44,87.53 D8.1 11.44,87.6 10.57,88.47 | v7.7,45.5 7.7,44.46 U2.1 | v11.78,49.58 11.78,50.07 12.06,50.34 U2.29_1 | C10.2 28.4,96.81 26.95,96.81 26.88,96.88 CHANGE_BUTTON.2 26.81,96.95 24.46,96.95 | 24.46,96.95 23.42,96.95 CHANGE_BUTTON.1 | 10.57,88.47 9.57,89.47 8.46,89.47 7.91,88.92 7.21,88.92 C9.2 | 4.24,81.44 5.14,81.44 J4.P6 | 4.24,81.44 2.57,83.1 2.57,84.21 J4.G4 2.57,84.28 2.57,94.67 4.24,96.33 6.24,96.33 12.2,90.37 | J4.G3 1.6,71.12 1.6,78.74 4.24,81.37 4.24,81.44 | 12.2,90.37 12.2,90.09 10.61,88.5 10.57,88.47 | v18.78,96.88 12.27,90.37 12.2,90.37 | v24.46,96.88 24.46,96.95 | C1_BAT2.2 128.89,39.4 127.02,39.4 125.35,37.74 C3.- 125.28,37.74 v120.78,37.74 | 115.04,39.2 115.04,37.46 C1_BAT1.2 | 115.04,39.2 114.27,39.96 R1_PWRUSB.1 | 118.36,40.23 116.01,40.23 115.04,39.27 115.04,39.2 | 118.36,40.23 119.19,40.23 IC4.2
  Top 0.15: v118.36,40.16 118.36,40.23 | U4.9 133.46,52.98 133.46,52.84 132.9,52.28 132.56,52.28 U4.4 132.49,52.22 132.49,50.69 130.69,48.89 124.59,48.89 124.52,48.89 | U4.9 133.53,52.84 134.43,52.84 U4.6 134.49,52.77 147.31,52.77 150.7,56.16 156.93,56.16 v157,56.16 157.07,56.23 157.11,56.27 | U4.1 132.56,53.74 132.9,53.74 133.46,53.18 133.46,53.05 U4.9 | 124.52,48.89 124.52,49.38 123.97,49.93 123.69,49.93 MCP73831.2 123.62,49.93 122.86,49.93 | 124.52,48.89 124.52,48.68 121.61,45.77 121.13,45.77 R2_BAT.1 121.06,45.7 v118.36,43 | 122.86,49.93 120.78,49.93 120.23,49.38 120.23,48.82 119.88,48.48 118.98,48.48 118.36,49.1 118.15,49.1 C1_BAT.2 | C2_BAT.2 127.78,54.02 125.56,54.02 122.86,51.31 122.86,50 122.86,49.93 | 159.01,8.45 158.32,8.45 157.9,8.86 157.9,9.14 SENSOR2.7 157.83,9.21 157.83,10.18 157.07,10.94 157.07,12.05 SENSOR2.1 | 159.01,8.45 159.42,8.86 159.42,9.14 SENSOR2.5 159.49,9.21 164.96,14.68 164.96,17.66 J3.1 165.03,17.73 165.31,17.73 165.93,18.35 165.93,49.24 165.93,49.31 | 159.01,8.45 159.01,8.38 159.01,5.26 C1.2 158.8,5.19 160.05,5.19 C2.2 160.12,5.12 160.19,5.05 168.15,5.05 TP4.TP | J2.B12 164,51.31 164,51.11 J2.A1 164,51.04 164,50.9 | 164,50.9 164,49.79 164.48,49.31 J2.MP3 164.62,49.31 165.93,49.31 | 165.93,49.31 168.43,49.31 J2.MP1 | C4_USB.2 154.51,49.31 154.51,50.41 C5_USB.2 154.44,50.48 153.05,50.48 151.05,52.49 150.63,52.49 R2-USB1.1 150.56,52.56 149.87,53.25 149.87,54.22 150.08,54.43 151.11,54.43 152.36,53.18 153.33,53.18 D1.2 153.4,53.18 154.02,53.18 v154.37,53.53 | 157.11,56.27 157.07,56.3 157.07,57.2 157.28,57.41 163.93,57.41 J2.B1 164,57.48 164,57.69 J2.A12 164,57.76 164.48,58.24
  Top 0.15: 157.11,56.27 157.69,55.68 157.69,55.54 R2-USB.2 | 164.48,58.24 164.48,59.49 J2.MP4 164.55,59.55 168.43,59.55 J2.MP2 | 164,50.9 164.06,50.9 165.31,50.9 165.66,51.24 165.66,57.55 164.96,58.24 164.55,58.24 164.48,58.24 | J4.G2 15.73,79.78 14.97,79.01 14.97,75.97 15.73,75.21 15.73,74.17 J4.G1 15.8,74.1 37.34,52.56 | 37.34,52.56 37.68,52.91 U1.9 37.34,52.56 | 37.34,52.56 35.81,51.04 33.94,51.04 U1.4 33.87,51.04 33.87,47.44 34.15,47.16 D9.1 34.22,47.09 v35.26,46.05 | 84.91,15.65 80.96,15.65 80.76,15.44 80.76,15.03 J1.17 80.69,14.96 80.69,14.61 80.41,14.34 76.95,14.34 70.78,20.5 70.75,20.53 | 84.91,15.65 85.19,15.37 85.19,15.03 J1.8 | EPD_C10.2 80,25 EPD_C9.2 81.73,25.07 81.73,27.21 87.06,32.55 88.31,32.55 88.51,32.34 88.51,31.23 | EPD_C8.2 83.39,25 84.98,25 EPD_C7.2 EPD_C6.2 86.99,25 87.61,25 | J1.MP1 89.69,12.53 89.69,24.03 88.72,25 EPD_C5.2 | 87.61,25 88.65,25 EPD_C5.2 | 88.51,31.23 88.51,25.07 EPD_C5.2 | 84.91,15.65 84.91,15.72 84.91,20.57 87.61,23.27 87.61,24.93 87.61,25 | EPD_C11.2 78.19,25.07 76.46,25.07 EPD_C12.2 76.46,25.14 76.46,25.55 74.46,27.56 74.46,28.67 73.97,29.15 73.42,29.15 73.35,29.15 | 73.35,29.15 73.35,30.12 C7.2 | 73.35,29.15 72.31,28.12 D6.1 72.24,28.05 72.24,22.02 70.75,20.53 | 68.43,16.97 68.43,19.32 69.05,19.94 EPD_C1.2 69.12,20.01 70.3,20.01 EPD_C2.2 70.3,20.08 70.75,20.53 | 68.43,16.97 68.43,16.83 72.72,12.53 76.19,12.53 J1.MP2 | 65.9,15.41 66.42,15.93 66.42,16.83 66.56,16.97 68.36,16.97 68.43,16.97 | 65.9,15.41 64.97,14.47 R4.2 | SJ1.1 64.69,11.84 65.04,11.84 66.15,12.95 67.05,12.95 67.25,13.16 67.25,14.06 65.94,15.37 65.9,15.41
  Top 0.15: C10_SUPERCAP.1 95.51,54.98 95.02,54.5 92.32,54.5 C8.2 92.25,54.5 92.04,54.71 86.23,54.71 85.33,53.81 85.33,53.46 U3.13 85.26,53.39 85.26,51.8 84.29,50.83 84.29,43.07 | v41.91,36.91 41.49,36.49 41.49,36.08 D10.1 | v43.36,36.91 44.19,36.08 D11.1 44.26,36.08 45.85,36.08 D12.1 45.92,36.01 71.13,36.01 72.38,34.76 72.45,34.76 | 72.45,34.76 72.45,31.16 71.69,30.4 71.69,30.19 R2.1 | 72.45,34.76 77.78,40.1 81.38,40.1 | 81.38,40.1 81.93,39.54 D3.1 | 84.29,43.07 81.38,40.16 81.38,40.1 | 93.85,37.4 93.85,33.24 91.84,31.23 88.58,31.23 88.51,31.23 | 93.85,37.4 88.17,43.07 84.36,43.07 84.29,43.07 | v96.68,40.16 93.91,37.4 93.85,37.4
  Bottom 0.15: v51.53,92.17 v51.53,95.98 51.46,95.98 25.43,95.98 24.53,96.88 v24.46,96.88 v18.78,96.88 | v7.7,45.5 v11.78,49.58 11.85,49.58 22.52,49.58 23.35,50.41 30.83,50.41 35.19,46.05 v35.26,46.05 35.26,45.36 41.91,38.71 41.91,36.98 v41.91,36.91 v43.36,36.91 | v118.36,40.16 v120.78,37.74 | v118.36,43 118.36,40.23 v118.36,40.16 | v157,56.16 v154.37,53.53 | v96.68,40.16 118.29,40.16 v118.36,40.16
  pour Top: -7.51,-17.22 185.64,-17.22 185.64,106.82 -7.51,106.82
  pour Bottom: -7.41,-17.42 185.54,-17.42 185.54,106.52 -7.41,106.52
GPIO8
  Top 0.15: R1.2 19.26,41.62 19.26,44.25 19.12,44.39 U2.10
I2C_PW  (via drill 0.3)
  Top 0.15: C2.1 158.8,3.88 C1.1 158.73,3.95 158.73,4.09 157.62,5.19 R2_PINH.2 157.56,5.26 157.07,5.26 | 157.07,5.26 156.38,5.26 R1_PINH.2 | 157.07,5.26 157.07,5.33 157.07,9.14 SENSOR2.8 157,9.21 157,10.6 156.59,11.01 156.59,12.74 156.59,12.81 | SENSOR2.6 158.59,9.21 158.59,10.39 157.9,11.08 157.9,12.05 SENSOR2.2 157.83,12.12 157.83,12.33 157.35,12.81 156.59,12.81 | v22.52,60.73 21.69,61.56 21.69,61.84 U2.17 | v103.4,47.09 103.61,47.09 137.89,12.81 156.59,12.81
  Bottom 0.15: v22.52,60.73 22.62,60.73 89.76,60.73 v103.4,47.09
INT_RTC  (via drill 0.3)
  Top 0.15: v29.51,55.33 23.63,49.44 21.34,49.44 16.56,44.67 16.56,44.46 U2.8 | v85.05,59.45 85.05,60.63 86.5,62.09 86.5,62.74 U3.3 86.57,62.81 87.34,63.57 87.34,65.16 R1_PINH1.1 87.41,65.23 87.68,65.51 87.68,67.52 86.78,68.42 86.78,89.06 TP15.TP
  Bottom 0.15: v29.51,55.33 29.51,58.79 30.17,59.45 v85.05,59.45
IO/BOOT  (via drill 0.3)
  Top 0.15: C6.1 68.22,98.13 66.91,98.13 66.63,98.4 BOOT_BUTTON.3 66.56,98.47 63.1,98.47 BOOT_BUTTON.4 63.03,98.4 62.75,98.13 61.44,98.13 R_BOOT.2 61.3,98.13 v60.4,98.13 | v25.77,63.5 24.18,61.91 U2.15
  Bottom 0.15: v60.4,98.13 v25.77,63.5
IO/CHANGE
  Top 0.15: C10.1 28.4,98.13 27.16,98.13 26.88,98.4 CHANGE_BUTTON.3 26.81,98.47 23.42,98.47 CHANGE_BUTTON.4 23.35,98.4 23.07,98.13 21.83,98.13 R_CHANGE.2 21.8,98 21.89,98 21.9,98 14.69,90.79 14.69,73.41 15.11,72.99 15.11,64.33 14.07,63.29 14.07,61.91 U2.23
MISO  (via drill 0.3)
  Top 0.15: R8.1 45.65,32.62 45.65,34.28 45.85,34.49 D12.2 45.92,34.56 46.89,35.52 v47.45,35.52 | U1.2 33.81,53.53 33.39,53.53 v33.04,53.18 32.97,53.18 32.39,53.18 v30.47,51.26 | v8.88,77.42 8.88,61.91 U2.27 | J4.P7 5.34,82.48 4.93,82.06 v4.24,82.06 4.37,82.13 4.37,84 4.72,84.35 TP6.TP
  Bottom 0.15: v33.04,53.18 33.04,49.93 v47.45,35.52 | v4.24,82.06 v8.88,77.42 8.88,77.35 8.88,72.85 v30.47,51.26
MOSI  (via drill 0.3)
  Top 0.15: v14.35,43.14 15.25,44.04 15.25,44.39 U2.7 15.32,44.46 15.73,44.87 15.73,54.08 v15.25,54.57 | v3.47,32.27 2.5,31.3 TP7.TP | v6.52,77.77 6.24,78.05 5.41,78.05 J4.P3 | v73.14,17.11 76.53,13.71 81.86,13.71 82.21,14.06 82.21,14.96 J1.14 | v44.75,31.86 44.05,32.55 R7.1 44.05,32.62 44.19,32.76 44.19,34.49 D11.2 | 41.56,43.14 41.56,37.4 v41.42,37.26 | 41.56,43.14 41.56,51.04 U1.5 | v36.44,43.14 41.49,43.14 41.56,43.14
  Bottom 0.15: v3.47,32.27 v14.35,43.14 14.42,43.14 v36.44,43.14 | v6.52,77.77 6.52,63.29 v15.25,54.57 | v73.14,17.11 66.91,17.11 66.77,16.97 59.64,16.97 v44.75,31.86 44.75,31.92 41.42,35.25 v41.42,37.26
N$1
  Top 0.15: R2-USB1.2 150.63,53.81 150.63,53.6 151.88,52.35 151.88,52.08 152.29,51.66 160.53,51.66 161.99,53.12 163.93,53.12 J2.A5
N$2
  Top 0.15: R2-USB.1 157.76,56.72 162.89,56.72 163.44,56.16 163.93,56.16 J2.B5
N$3
  Top 0.15: C1_BAT1.1 116.35,37.46 116.35,39.4 D2.1 116.42,39.33 119.19,39.33 IC4.3 119.26,39.27 119.88,39.89 119.88,40.65 | 119.88,40.65 119.74,40.79 119.68,40.79 119.26,41.2 IC4.1 | Q1.2 131.1,47.44 130.34,47.44 124.87,41.97 121.27,41.97 119.95,40.65 119.88,40.65
N$5
  Top 0.15: R1_BAT.1 114.27,50.83 114.41,50.83 118.78,46.47 121.61,46.47 123.62,48.48 123.62,49.03 MCP73831.1
N$6
  Top 0.15: C4.1 93.15,36.91 92.67,36.91 91.28,35.52 D4.1 91.21,35.52 89.21,37.53 82.63,37.53 80.69,39.47 78.54,39.47 D3.2
N$7
  Top 0.15: CHG_LED.C 118.08,50.9 115.59,50.9 R1_BAT.2
N$8
  Top 0.15: R2_BAT.2 121.13,47.09 121.13,49.03 MCP73831.5
N$10
  Top 0.15: J1.5 86.64,14.96 86.64,14.54 84.29,12.19 77.43,12.19 70.92,18.7 70.37,18.7 EPD_C2.1
N$11  (via drill 0.3)
  Top 0.15: v85.4,18.49 87.2,16.69 87.2,15.03 J1.4 | v71.2,19.04 70.92,19.32 69.68,19.32 69.12,18.77 EPD_C1.1
  Bottom 0.15: v85.4,18.49 74.04,18.49 73.49,19.04 v71.2,19.04
N$12
  Top 0.15: IC1.5 50.91,93.42 52.57,93.42 C_DELAY.1
N$14
  Top 0.15: R_CAPACITOR.2 83.73,50 83.73,51.52 84.57,52.35 84.57,64.54 86.99,66.97 D7.1
N$20
  Top 0.15: J1.24 77.16,15.03 77.16,22.99 76.46,23.68 EPD_C12.1
N$22
  Top 0.15: J1.22 78.26,15.03 78.26,22.02 79.93,23.68 EPD_C10.1
N$23
  Top 0.15: J1.20 79.23,15.03 79.23,19.6 83.32,23.68 EPD_C8.1
N$25
  Top 0.15: J1.18 80.2,15.03 80.2,16.97 86.92,23.68 EPD_C6.1
N$26
  Top 0.15: J1.19 79.72,15.03 79.72,18.42 84.98,23.68 EPD_C7.1
PREVGH
  Top 0.15: J1.21 78.75,15.03 78.75,20.77 81.66,23.68 EPD_C9.1 81.73,23.75 82.35,24.38 82.35,25.14 87.61,30.4 87.61,31.86 D5.1
PREVGL
  Top 0.15: J1.23 77.71,15.03 77.71,23.27 78.19,23.75 EPD_C11.1 78.26,23.82 78.89,24.45 78.89,25.07 87.68,33.86 87.68,35.46 D4.2
RESE
  Top 0.15: 67.53,11.84 66.98,11.84 66.56,12.26 R3.1 | 67.53,11.84 84.91,11.84 87.68,14.61 87.68,14.96 J1.3 | Q3.2 66.91,16.2 66.91,14.82 67.53,14.2 67.53,11.91 67.53,11.84
RESE'
  Top 0.15: 63.76,12.64 63.17,12.05 63.17,11.84 SJ1.2 | 63.76,12.64 63.93,12.81 64.97,12.81 65.66,13.5 66.49,13.5 R3.2 | R2.2 71.62,31.44 71.62,31.23 63.1,22.71 63.1,13.3 63.72,12.67 63.76,12.64
RESET
  Top 0.15: C5.1 53.13,98.27 51.6,98.27 51.46,98.4 RESET_BUTTON.3 51.39,98.47 48,98.47 RESET_BUTTON.4 47.93,98.4 47.79,98.4 47.03,97.64 47.03,97.57 | 47.03,97.57 47.03,96.33 48.07,95.29 48.07,93.49 IC1.1 48,93.49 47.1,93.49 40.8,87.19 40.8,49.72 32.01,40.93 13.38,40.93 10.26,44.04 10.26,44.39 U2.3 | 47.03,97.57 46.41,98.2 R_RESET.2
RTC_RST  (via drill 0.3)
  Top 0.15: v28.06,61.22 27.71,60.87 23.69,60.87 22.93,61.63 22.93,61.84 U2.16 | v85.05,61.26 85.05,62.53 85.26,62.74 U3.4
  Bottom 0.15: v28.06,61.22 28.26,61.02 84.91,61.02 85.05,61.16 v85.05,61.26
RX
  Top 0.15: U2.24 12.75,61.91 12.75,63.71 13.79,64.75 TP2.TP
SCK  (via drill 0.3)
  Top 0.15: v15.25,53.95 15.25,46.26 14.57,45.58 14.57,44.96 U2.6 | TP8.TP 2.23,66.06 2.57,65.72 v3.47,65.72 3.47,65.79 3.47,78.94 4.79,80.26 5.34,80.26 J4.P5 | 42.39,39.68 42.39,35.46 41.49,34.56 D10.2 41.49,34.49 41.49,34.14 42.25,33.38 v42.25,33.31 42.25,33.17 41.7,32.62 R6.1 | 42.39,39.68 42.39,51.24 41.63,52.01 41.63,52.28 U1.6 | v82.7,13.99 82.7,14.96 J1.13 | v42.05,39.68 42.32,39.68 42.39,39.68
  Bottom 0.15: v3.47,65.72 v15.25,53.95 15.32,53.95 27.16,53.95 30.41,50.69 31.24,50.69 42.05,39.89 v42.05,39.68 | v82.7,13.99 82.56,13.99 82,13.43 62.13,13.43 v42.25,33.31
SCL  (via drill 0.3)
  Top 0.15: v157.62,3.19 157.62,3.88 R2_PINH.1 | v159.08,11.15 159.08,11.49 159.42,11.84 159.42,12.05 SENSOR2.4 | v135.74,53.25 134.49,53.25 U4.7 | 164.31,21.36 164.96,20.71 J3.4 | v135.54,49.73 135.54,49.33 163.91,20.96 164.31,21.36 | v164.34,21.4 164.31,21.36 | v30,58.66 20.79,58.66 17.88,61.56 17.88,61.84 U2.20 | U3.16 89.14,53.46 v89.76,54.08 89.83,54.08 90.04,53.88 96.27,53.88 97.45,52.7 v97.45,51.8
  Bottom 0.15: v157.62,3.19 157.62,9.7 v159.08,11.15 159.08,11.22 159.08,13.85 164.34,19.11 v164.34,21.4 | v135.74,53.25 135.54,53.05 v135.54,49.73 135.44,49.73 135.13,49.73 131.73,46.33 102.92,46.33 v97.45,51.8 | v30,58.66 85.19,58.66 v89.76,54.08
SDA  (via drill 0.3)
  Top 0.15: v33.81,55.47 30.14,59.14 20.95,59.14 19.12,60.96 19.12,61.84 U2.19 | v87.82,52.01 87.82,53.39 U3.15 | v155.69,4.57 156.31,3.95 R1_PINH.1 | v158.46,11.15 158.46,11.91 158.59,12.05 SENSOR2.3 | v135.26,53.74 134.49,53.74 U4.8 | v135.05,50.17 135.05,49.38 164.69,19.74 164.96,19.74 J3.3 164.48,19.88 v163.86,19.25
  Bottom 0.15: v33.81,55.47 84.36,55.47 v87.82,52.01 87.89,52.01 97.03,52.01 97.31,52.28 97.58,52.28 103.26,46.6 131.31,46.6 134.88,50.17 v135.05,50.17 135.26,50.38 v135.26,53.74 | v155.69,4.57 155.69,8.38 v158.46,11.15 158.46,11.22 158.46,13.85 v163.86,19.25
SRC
  Top 0.15: 91.94,32.65 91.21,31.92 D5.2 | 91.94,32.65 93.15,33.86 93.15,35.59 C4.2 | Q3.3 66.28,18.35 66.28,23.68 72.72,30.12 72.72,31.92 77.57,36.77 80.13,36.77 L1.1 80.2,36.77 87.82,36.77 91.91,32.69 91.94,32.65
SS_SD  (via drill 0.3)
  Top 0.15: 8.94,86.84 8.94,85.45 7.01,83.52 7.01,77.63 6.45,77.08 5.83,77.08 J4.P2 6.45,77.01 6.59,76.87 6.59,54.15 11.44,49.31 11.44,44.46 U2.4 | 8.94,86.84 8.94,88.85 R10.1 | v12.2,86.84 12.89,87.53 D8.2 | v9.01,86.84 8.94,86.84
  Bottom 0.15: v9.01,86.84 v12.2,86.84
TX
  Top 0.15: U2.25 11.44,61.91 11.44,64.61 11.37,64.68 TP1.TP
USB_D+  (via drill 0.3)
  Top 0.15: v152.08,54.08 153.33,54.08 D1.1 | v37.41,47.09 36.92,47.09 33.59,43.76 24.49,43.76 24.16,44.09 U2.14
  Bottom 0.15: v152.08,54.08 140.52,54.08 132.49,46.05 38.45,46.05 v37.41,47.09
USB_D-  (via drill 0.3)
  Top 0.15: v152.36,52.22 153.33,52.22 D1.3 | v37.06,46.6 36.85,46.6 33.67,43.42 23.63,43.42 22.93,44.11 22.93,44.39 U2.13
  Bottom 0.15: v152.36,52.22 139.07,52.22 132.63,45.77 37.89,45.77 v37.06,46.6
VBAT
  Top 0.3: U4.2 132.56,53.25 132.56,52.84 U4.3 132.35,52.77 132,52.77 | 127.85,51.87 127.85,52.77 C2_BAT.1 | 129.47,50.24 130.13,49.58 Q1.3 | 129.47,50.24 127.85,51.87 | 132,52.77 129.58,50.34 129.47,50.24 | MCP73831.3 123.69,50.97 126.88,50.97 127.71,51.8 127.85,51.87 | TP3.TP 130.96,64.47 130.96,53.88 131.93,52.91 132,52.77
VBUS
  Top 0.3: CHG_LED.A 119.61,50.9 121.06,50.9 MCP73831.4 121.2,51.04 128.19,58.03 128.19,64.33 TP14.TP | C1_BAT.1 119.47,49.17 119.47,50.83 CHG_LED.A | C5_USB.1 155.82,50.41 155.82,49.31 C4_USB.1 155.69,49.17 155.13,48.61 155.06,48.61 153.05,46.6 151.53,46.6 PFMF.050.1.2 151.39,46.54 149.45,48.48 149.45,50.83 | 149.45,50.83 149.45,54.36 149.94,54.85 153.95,54.85 154.3,54.5 154.3,54.36 155.48,53.18 155.82,53.18 D1.5 | 149.45,50.83 149.31,50.83 133.18,50.83 129.79,47.44 129.37,47.44 Q1.1 129.16,47.44 123.97,47.44 118.08,41.55 116.49,41.55 D2.2 116.35,41.48 116.21,41.34 114.27,41.34 R1_PWRUSB.2 114.2,41.48 113.58,42.1 113.58,51.38 113.79,51.59 118.64,51.59 119.33,50.9 CHG_LED.A
VRTC
  Top 0.3: C10_SUPERCAP.2 95.51,52.91 95.3,53.12 92.32,53.12 C8.1 92.18,53.05 90.38,53.05 88.79,51.45 87.61,51.45 86.64,52.42 U3.14 86.5,53.39 86.5,52.49 85.05,51.04 85.05,50 R_CAPACITOR.1
VUSB
  Top 0.3: J2.A9 164,56.92 164,56.72 J2.B4 164.13,56.65 164.62,56.65 165.17,56.09 165.17,52.7 164.69,52.22 164.13,52.22 J2.B9 164,52.15 164,51.87 J2.A4 163.86,51.8 161.23,51.8 155.96,46.54 PFMF.050.1.1

## Text on the board
tPlace: MISO | GND | INT_RTC | 3V3 | SCK | TX | RX | EPD_RST | EPD_3V3_C | VBUS | VBAT | EPD_DC | EPD_BUSY | MOSI | GND | EPD_CS | EPD_3V3